# EAGLE board VGM-Panelized (EAGLE 7.7.0)
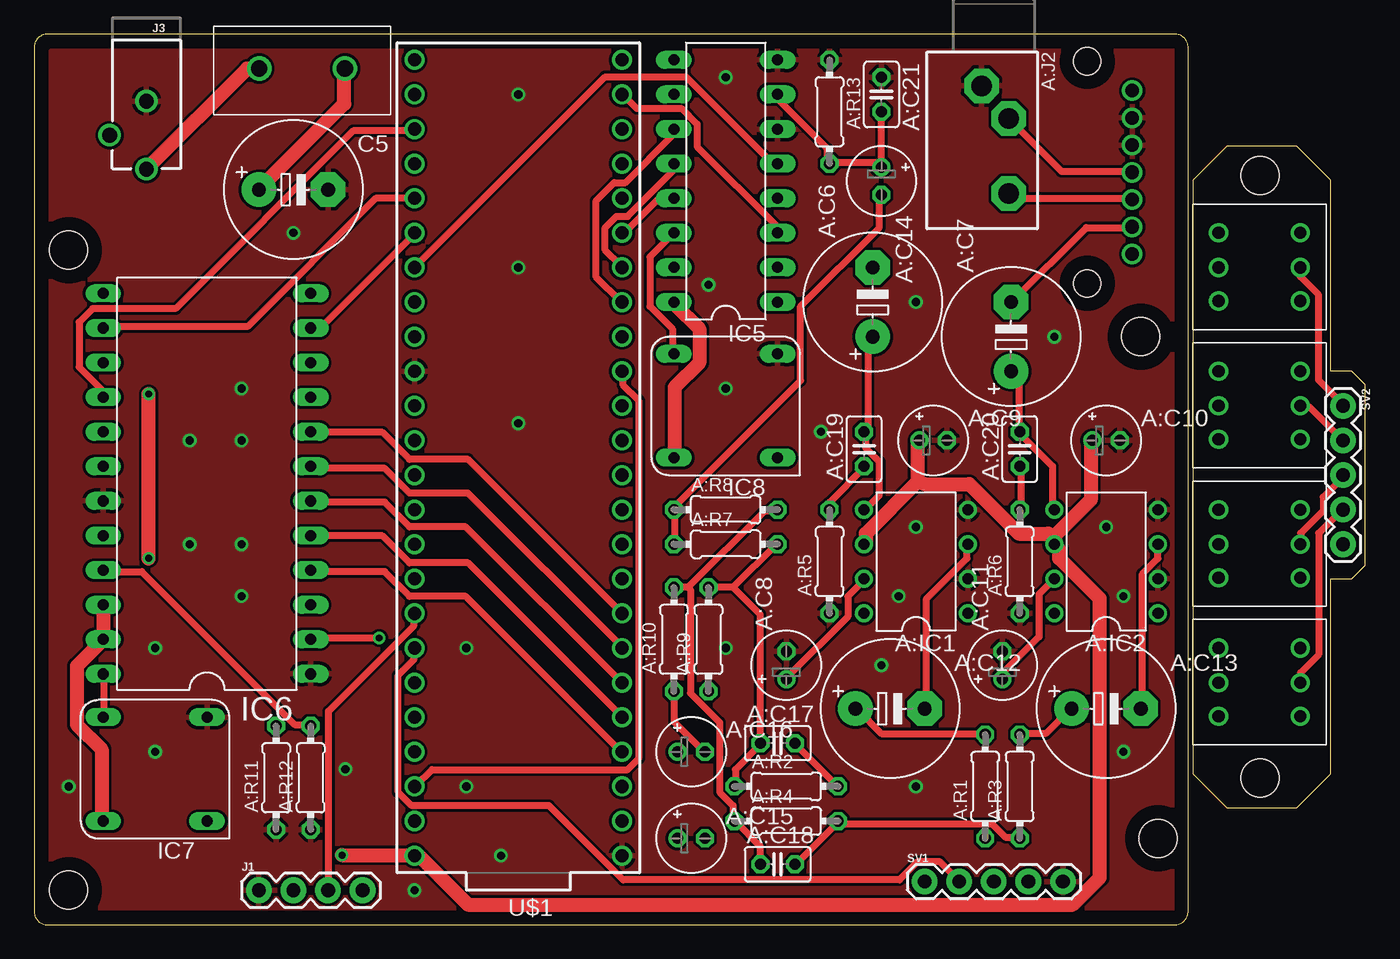
[diagram p0: board, top side]
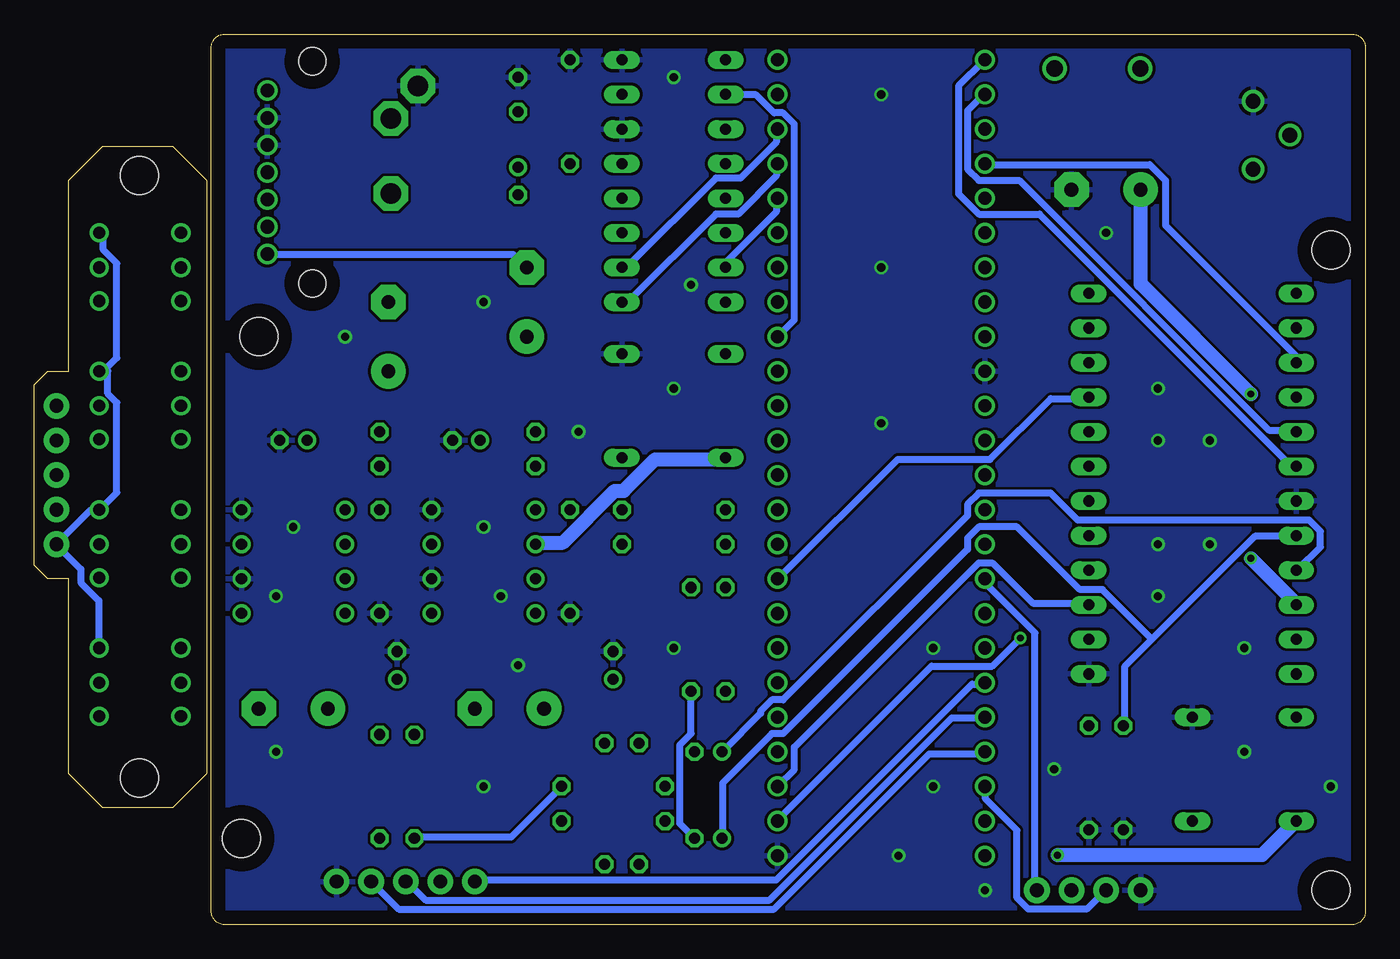
[diagram p1: board, bottom side, seen from below]

Size 97.78 x 65.39 mm. Coordinates in mm from the lower left corner, seen from the top.
Outline: 83.76,65.39 1,65.39 arc90 0,64.39 0,1 arc90 1,0 83.76,0 arc90 84.76,1 84.76,64.39 arc90 83.76,65.39
Outline: 95.25,40.64 95.25,54.65 92.75,57.15 87.59,57.15 85.09,54.65 85.09,11.09 87.59,8.59 92.74,8.59 95.24,11.08 95.25,25.4 96.78,25.4 97.78,26.4 97.78,39.64 96.78,40.64 95.25,40.64
Copper layers (1*16): Top 0.035mm / dielectric 1.5mm / Bottom 0.035mm
Design rules "default": minimum track width 10mil, minimum drill 24mil, track to track 8mil, track to pad 8mil, pad to pad 8mil, via to via 8mil, smd to smd 8mil, copper to edge 40mil, drill to drill 8mil, minimum pad ring 10mil, minimum via ring 8mil, stop-mask expansion 4mil, vias tented up to drill 0mil, thermal gap 10mil
Net classes: 0 default: width 0.508 mm; 1 power: width 1.016 mm
Holes 2.8 mm at 2.54,49.53 2.54,2.54 81.28,43.18 82.55,6.35 90.06,54.99 90.06,10.79

## Footprints (pad centres in the part's own frame; a part is rotated, then mirrored left to right if it is on the bottom)
E5-10,5 = drill 1.016 pad 2.54: + -2.54,0 | drill 1.016 pad 2.54 octagon: - 2.54,0
E2-5 = drill 0.813 pad 1.27: + -1.016,0 | drill 0.813 pad 1.27 octagon: - 1.016,0
C025-025X050 = drill 0.813 octagon: 1 -1.27,0; 2 1.27,0
DIL08 = drill 0.813 pad 1.27: 1 -3.81,-3.81; 2 -1.27,-3.81; 3 1.27,-3.81; 4 3.81,-3.81; 5 3.81,3.81; 6 1.27,3.81; 7 -1.27,3.81; 8 -3.81,3.81
SJ1-3533NG = drill 1.5 pad 2.54 octagon: 1 0,-0.9; 2 2.4,1.1; 3 7.9,1.1
0204/7 = drill 0.813 octagon: 1 -3.81,0; 2 3.81,0
P14O = drill 1: 1 -4,0; 1' -6,0; 2 -2,0; 2' 0,0; 3 2,0; 3' 4,0; NC 6,0 | hole 2: -8.15,3.3; 8.15,3.3
DIL16 = drill 0.813 long: 1 -8.89,-3.81; 2 -6.35,-3.81; 3 -3.81,-3.81; 4 -1.27,-3.81; 5 1.27,-3.81; 6 3.81,-3.81; 7 6.35,-3.81; 8 8.89,-3.81; 9 8.89,3.81; 10 6.35,3.81; 11 3.81,3.81; 12 1.27,3.81; 13 -1.27,3.81; 14 -3.81,3.81; 15 -6.35,3.81; 16 -8.89,3.81
DIL24-6 = drill 0.813 long: 1 -13.97,-7.62; 2 -11.43,-7.62; 3 -8.89,-7.62; 4 -6.35,-7.62; 5 -3.81,-7.62; 6 -1.27,-7.62; 7 1.27,-7.62; 8 3.81,-7.62; 9 6.35,-7.62; 10 8.89,-7.62; 11 11.43,-7.62; 12 13.97,-7.62; 13 13.97,7.62; 14 11.43,7.62; 15 8.89,7.62; 16 6.35,7.62; 17 3.81,7.62; 18 1.27,7.62; 19 -1.27,7.62; 20 -3.81,7.62; 21 -6.35,7.62; 22 -8.89,7.62; 23 -11.43,7.62; 24 -13.97,7.62
DIL08-CLK = drill 0.813 long: 5 3.81,3.81; 5V -3.81,3.81; GND 3.81,-3.81; NC -3.81,-3.81
1X04 = drill 1.016 pad 1.88: 1 0,0; 2 2.54,0; 3 5.08,0; 4 7.62,0
POWER_JACK_PTH = drill 1.1: GND 0,6.2; GNDBREAK 2.7,8.7; PWR 0,11.2
1X05 = drill 1.016 pad 1.88: 1 0,0; 2 2.54,0; 3 5.08,0; 4 7.62,0; 5 10.16,0
TEENSY_3.5_DIL = drill 0.965: 0 -7.62,26.67; 1 -7.62,24.13; 2 -7.62,21.59; 3 -7.62,19.05; 3.3V 7.62,24.13; 3.3V3 -7.62,-6.35; 4 -7.62,16.51; 5 -7.62,13.97; 6 -7.62,11.43; 7 -7.62,8.89; 8 -7.62,6.35; 9 -7.62,3.81; 10 -7.62,1.27; 11 -7.62,-1.27; 12 -7.62,-3.81; 13 7.62,-3.81; 14/A0 7.62,-1.27; 15/A1 7.62,1.27; 16/A2 7.62,3.81; 17/A3 7.62,6.35; 18/A4 7.62,8.89; 19/A5 7.62,11.43; 20/A6 7.62,13.97; 21/A7 7.62,16.51; 22/A8 7.62,19.05; 23/A9 7.62,21.59; 24 -7.62,-8.89; 25 -7.62,-11.43; 26 -7.62,-13.97; 27 -7.62,-16.51; 28 -7.62,-19.05; 29 -7.62,-21.59; 30 -7.62,-24.13; 31/A12 -7.62,-26.67; 32/A13 -7.62,-29.21; 33/A14 7.62,-29.21; 34/A15 7.62,-26.67; 35/A16 7.62,-24.13; 36/A17 7.62,-21.59; 37/A18 7.62,-19.05; 38/A19 7.62,-16.51; 39/A20 7.62,-13.97; A21 7.62,-11.43; A22 7.62,-8.89; AGND 7.62,26.67; GND -7.62,29.21; GND1 7.62,-6.35; VIN 7.62,29.21
PVA = drill 0.9: 0 2.54,6; 0' 2.54,0; 1 5,6; 1' 5,0; 2 0,6; 2' 0,0
GPTS = drill 1.2: P$1 -3.15,0; P$2 3.15,0

## Placement (x,y rotation side)
A:C6  1000uF  [E5-10,5]  61.59,45.72 90 top
A:C7  1000uF  [E5-10,5]  71.75,43.18 90 top
A:C8  100uF  [E2-5]  55.24,19.05 90 top
A:C9  100uF  [E2-5]  66.04,35.56 0 top
A:C10  100uF  [E2-5]  78.74,35.56 0 top
A:C11  100uF  [E2-5]  71.12,19.05 90 top
A:C12  16uF  [E5-10,5]  62.87,15.88 0 top
A:C13  16uF  [E5-10,5]  78.74,15.88 0 top
A:C14  1uF  [E2-5]  62.23,54.61 270 top
A:C15  10uF  [E2-5]  48.26,6.35 0 top
A:C16  10uF  [E2-5]  48.26,12.7 0 top
A:C17  4.7nF  [C025-025X050]  54.61,13.34 0 top
A:C18  4.7nF  [C025-025X050]  54.61,4.45 0 top
A:C19  47nF  [C025-025X050]  60.96,34.92 90 top
A:C20  47nF  [C025-025X050]  72.39,34.92 90 top
A:C21  220pF  [C025-025X050]  62.23,60.96 270 top
A:IC1  LM386N-1  [DIL08]  64.77,26.67 90 top
A:IC2  LM386N-1  [DIL08]  78.74,26.67 90 top
A:J2  SJ1-3533NG  [SJ1-3533NG]  70.48,61.59 270 top
A:R1  11k  [0204/7]  69.85,10.16 90 top
A:R2  10k  [0204/7]  55.24,10.16 0 top
A:R3  11k  [0204/7]  72.39,10.16 90 top
A:R4  10k  [0204/7]  55.24,7.62 0 top
A:R5  10  [0204/7]  58.42,26.67 90 top
A:R6  10  [0204/7]  72.39,26.67 90 top
A:R7  51k  [0204/7]  50.8,27.94 0 top
A:R8  51k  [0204/7]  50.8,30.48 0 top
A:R9  2.2k  [0204/7]  49.53,20.95 90 top
A:R10  2.2k  [0204/7]  46.99,20.95 90 top
A:R11  2.2k  [0204/7]  17.78,10.79 90 top
A:R12  2.2k  [0204/7]  20.32,10.79 90 top
A:R13  2.2k  [0204/7]  58.42,59.69 270 top
A:U$1  P140KV1  [P14O]  80.64,55.24 90 top
C5  1000uF  [E5-10,5]  19.05,53.98 0 top
IC5  SN  [DIL16]  50.8,54.61 90 top
IC6  YM  [DIL24-6]  12.7,32.38 90 top
IC7  7.68MHz  [DIL08-CLK]  8.89,11.43 90 top
IC8  3.57MHz  [DIL08-CLK]  50.8,38.1 90 top
J1  OLED_128X64_I2C  [1X04]  16.51,2.54 0 top
J3  POWER_JACK  [POWER_JACK_PTH]  8.26,66.67 180 top
SV1  [1X05]  65.41,3.17 0 top
SV2  [1X05]  96.14,38.1 270 top
U$1  TEENSY_3.5_DIL  [TEENSY_3.5_DIL]  35.56,34.29 180 top
U$2  PVA2-OA  [PVA]  87,20.32 270 top
U$3  PVA2-OA  [PVA]  87,30.48 270 top
U$4  PVA2-OA  [PVA]  87,40.64 270 top
U$5  PVA2-OA  [PVA]  87,50.8 270 top
U$7  GPTS20  [GPTS]  19.68,62.87 0 top

## Library data of the parts
A:C6 A:C7 C5 = resistor; HEIGHT: 17.5
A:C8 A:C11 = resistor; HEIGHT: 12.5
A:C9 A:C10 A:C14 = resistor; HEIGHT: 12.7
A:C12 A:C13 = resistor; HEIGHT: 26.5
A:C15 A:C16 = resistor; HEIGHT: 6.5
A:C17-A:C21 = resistor; HEIGHT: 3
A:IC1 A:IC2 = linear; HEIGHT: 4.2
A:J2 = con-cuistack; HEIGHT: 12.3
A:R1-A:R13 = resistor; HEIGHT: 1.5
A:U$1 = Sega; HEIGHT: 16.7
IC5 IC6 = Sega; HEIGHT: 4.2
IC7 IC8 = Sega; HEIGHT: 5.4
J1 SV1 SV2 = SparkFun-Connectors
J3 = Sega; HEIGHT: 11; PROD_ID: CONN-08197
U$1 = Teensy_3_and_LC_Series_Boards_v1.4; HEIGHT: 4.2
U$2-U$5 = Sega; HEIGHT: 17.54
U$7 = Sega; HEIGHT: 12

## Nets
3V3: J1.2 U$1.3.3V U$1.3.3V3
5V [power]: A:C9.+ A:C10.+ A:IC1.6 A:IC2.6 C5.+ IC5.16 IC6.22 IC6.23 IC7.5V IC8.5V U$1.VIN U$7.P$2
A:N$1: A:C7.- A:U$1.1
A:N$2: A:C6.- A:U$1.1'
A:N$3: A:C6.+ A:C19.2 A:IC1.5
A:N$4: A:C7.+ A:C20.2 A:IC2.5
A:N$5: A:C8.+ A:IC1.7
A:N$6: A:C11.+ A:IC2.7
A:N$7: A:C12.- A:IC1.3
A:N$8: A:C13.- A:IC2.3
A:N$9: A:C12.+ A:R1.2
A:N$10: A:C13.+ A:R3.2
A:N$11: A:C19.1 A:R5.2
A:N$12: A:C20.1 A:R6.2
A:N$13: A:C18.1 A:R4.1 A:R8.2 A:R10.2
A:N$14: A:C17.1 A:R2.1 A:R7.2 A:R9.2
A:N$15: A:C14.- A:R7.1 A:R8.1
A:N$16: A:C15.- A:R9.1
A:N$17: A:C16.- A:R10.1
A:N$18: A:C17.2 A:R1.1 A:R2.2
A:N$19: A:C18.2 A:R3.1 A:R4.2
A:N$20: A:J2.2 A:U$1.2'
A:N$21: A:J2.3 A:U$1.2
AGND: U$1.AGND
GND [power]: A:C8.- A:C9.- A:C10.- A:C11.- A:C21.1 A:IC1.2 A:IC1.4 A:IC2.2 A:IC2.4 A:J2.1 A:R5.1 A:R6.1 A:R11.1 A:R12.1 A:R13.1 A:U$1.3 A:U$1.3' C5.- IC5.6 IC5.8 IC6.1 IC6.19 IC7.GND IC8.GND J1.1 J3.GND SV1.5 U$1.GND U$1.GND1
I2C_SCL: J1.3 U$1.19/A5
I2C_SDA: J1.4 U$1.18/A4
N$1: IC6.24 IC7.5
N$2: SV2.4 U$2.0
N$3: SV2.3 U$3.0
N$4: SV2.2 U$4.0
N$5: SV2.1 U$5.0
N$6: SV2.5 U$2.2 U$3.2 U$4.2 U$5.2
N$7: J3.PWR U$7.P$1
N$11: IC5.14 IC8.5
NEXT_BUTTON: SV1.4 U$1.23/A9
PAUSE: SV1.2 U$1.20/A6
PREV_BUTTON: SV1.1 U$1.21/A7
RAND_BUTTON: SV1.3 U$1.22/A8
SN_D0: IC5.10 U$1.24
SN_D1: IC5.11 U$1.25
SN_D2: IC5.12 U$1.26
SN_D3: IC5.13 U$1.27
SN_D4: IC5.15 U$1.28
SN_D5: IC5.1 U$1.29
SN_D6: IC5.2 U$1.30
SN_D7: IC5.3 U$1.31/A12
SN_OUT: A:C14.+ A:C21.2 A:R13.2 IC5.7
SN_WE: IC5.5 U$1.39/A20
YM_A0: IC6.17 U$1.34/A15
YM_A1: IC6.18 U$1.33/A14
YM_CS: IC6.14 U$1.37/A18
YM_D0: IC6.2 U$1.0
YM_D1: IC6.3 U$1.1
YM_D2: IC6.4 U$1.2
YM_D3: IC6.5 U$1.3
YM_D4: IC6.6 U$1.4
YM_D5: IC6.7 U$1.5
YM_D6: IC6.8 U$1.6
YM_D7: IC6.9 U$1.7
YM_IC: IC6.11 U$1.38/A19
YM_MOL: A:C16.+ A:R12.2 IC6.21
YM_MOR: A:C15.+ A:R11.2 IC6.20
YM_RD: IC6.16 U$1.35/A16
YM_WR: IC6.15 U$1.36/A17

## Tracks (layer width: path | path; a pad name or v marks a point on that pad's centre or on a via)
3V3
  Top 0.508: U$1.3.3V3 43.26,40.62 43.26,39.62 44.41,38.47 44.41,12.22 43.59,11.39 29.22,11.39 28.07,10.24 U$1.3.3V
  Bottom 0.508: U$1.3.3V 27.9,10.07 27.9,9.25 25.59,6.93 25.59,1.98 24.77,1.16 20.47,1.16 19.15,2.48 J1.2
5V  (via drill 0.5)
  Top 1.016: IC8.5V 47.05,34.34 47.05,39.46 48.87,41.27 48.87,43.75 47.05,45.57 IC5.16 | 74.95,28.56 74.95,28.07 A:IC2.6 75.29,27.57 75.29,26.91 78.26,23.94 78.26,3.47 76.28,1.49 31.86,1.49 28.4,4.95 U$1.VIN 27.9,5.12 v22.62,5.12 | 74.95,28.56 77.6,31.2 77.6,35.5 A:C10.+ | 64.88,32.52 61.09,28.73 61.09,28.07 A:IC1.6 | 64.88,32.52 64.88,35.5 A:C9.+ | 74.95,28.56 74.46,28.73 72.31,28.73 68.68,32.36 65.38,32.36 64.88,32.52 | U$7.P$2 22.78,62.74 22.78,60.26 C5.+ | IC7.5V 4.95,7.76 4.95,12.88 3.14,14.69 3.14,18.99 4.95,20.8 IC6.23 5.12,21.46 5.12,23.44 IC6.22 | v8.42,26.91 v8.42,38.96
  Bottom 1.016: IC8.5V 47.05,34.18 52.17,34.18 54.48,31.86 55.14,31.86 58.94,28.07 60.92,28.07 A:IC1.6 | v22.62,5.12 7.59,5.12 5.12,7.59 IC7.5V | C5.+ 16.51,47.05 v8.42,38.96 | v8.42,26.91 5.12,23.61 IC6.22
A:N$1
  Top 0.508: A:U$1.1 80.57,51.18 77.27,51.18 71.82,45.73 A:C7.-
A:N$2
  Bottom 0.508: A:U$1.1' 80.57,49.2 62.57,49.2 61.75,48.37 A:C6.-
A:N$3
  Top 0.508: A:IC1.5 61.09,30.54 62.08,31.53 62.08,34.01 61.09,35 61.09,36.16 A:C19.2 61.25,36.32 61.25,42.76 61.58,43.09 A:C6.+
A:N$4
  Top 0.508: A:C7.+ 71.82,40.62 72.31,40.12 72.31,36.32 A:C20.2 72.48,35.99 74.79,33.68 74.79,30.54 A:IC2.5
A:N$5
  Top 0.508: A:C8.+ 55.31,18.16 59.77,22.62 59.77,24.11 60.92,25.26 A:IC1.7
A:N$6
  Top 0.508: A:IC2.7 73.8,24.27 73.8,21.13 71.16,18.49 71.16,18.16 A:C11.+
A:N$7
  Top 0.508: A:IC1.3 68.52,27.9 68.52,26.91 65.55,23.94 65.55,16.02 A:C12.-
A:N$8
  Top 0.508: A:IC2.3 82.55,26.91 81.39,25.76 81.39,16.02 A:C13.-
A:N$9
  Top 0.508: A:R1.2 69.84,14.03 62.24,14.03 60.43,15.85 A:C12.+
A:N$10
  Top 0.508: A:R3.2 72.48,14.03 74.3,14.03 76.11,15.85 A:C13.+
A:N$11
  Top 0.508: A:R5.2 58.45,30.54 58.45,31.04 60.92,33.52 A:C19.1
A:N$12
  Top 0.508: A:R6.2 72.48,30.54 72.48,33.52 A:C20.1
A:N$13
  Top 0.508: A:C18.1 53.33,4.46 53.33,5.78 51.51,7.59 A:R4.1 51.35,7.76 51.35,8.75 50.35,9.74 50.35,14.86 48.21,17 48.21,24.6 48.04,24.77 | 48.04,24.77 A:R10.2 | 48.04,24.77 53.66,30.38 54.48,30.38 A:R8.2
A:N$14
  Top 0.508: A:R2.1 51.51,10.24 51.51,11.39 53.33,13.21 A:C17.1 53.33,13.54 53.33,22.78 51.35,24.77 | 51.35,24.77 A:R9.2 | 51.35,24.77 54.48,27.9 A:R7.2
A:N$15
  Top 0.508: A:R7.1 47.05,28.07 47.05,30.38 A:R8.1 47.05,30.71 56.3,39.95 56.3,45.4 62.08,51.18 62.08,53.49 A:C14.-
A:N$16
  Bottom 0.508: A:R9.1 49.53,14.03 50.35,13.21 50.35,7.43 A:C15.-
A:N$17
  Top 0.508: A:R10.1 47.05,17 47.05,14.86 49.2,12.71 A:C16.-
A:N$18
  Top 0.508: A:R2.2 58.94,10.24 55.97,13.21 A:C17.2
  Bottom 0.508: A:R1.1 69.84,6.44 62.74,6.44 59.11,10.07 A:R2.2
A:N$19
  Top 0.508: A:C18.2 55.97,4.46 59.11,7.59 A:R4.2 59.27,7.43 70.33,7.43 71.32,6.44 72.31,6.44 A:R3.1
A:N$20
  Top 0.508: A:U$1.2' 80.57,55.31 75.45,55.31 71.65,59.11 A:J2.2
A:N$21
  Top 0.508: A:U$1.2 80.57,53.33 71.98,53.33 71.65,53.66 A:J2.3
GND  (via drill 0.6)
  other vias: 11.43,27.94 15.24,35.56 35.56,60.96 35.56,48.26 11.43,35.56 15.24,27.94 31.75,20.32 31.75,10.16 22.86,11.43 8.89,12.7 50.8,39.37 62.23,19.05 80.01,12.7 64.77,29.21 78.74,29.21 63.5,24.13 80.01,24.13 50.8,20.32 50.8,62.23 49.53,46.99 64.77,45.72 74.93,43.18 35.56,36.83 34.29,5.08 27.94,2.54 64.77,10.16 15.24,39.37 15.24,24.13 19.05,50.8 8.89,20.32 2.54,10.16 57.78,36.2
  pour Bottom: 1.27,64.14 83.82,64.14 83.82,1.27 1.27,1.27
  pour Top: 1.27,64.14 83.82,64.14 83.82,1.27 1.27,1.27
I2C_SCL
  Top 0.508: U$1.19/A5 27.9,22.78 27.9,21.96 21.63,15.68 21.63,2.64 J1.3
I2C_SDA
  Bottom 0.508: U$1.18/A4 27.9,25.26 27.9,25.07 24.27,21.44 24.27,2.64 J1.4
N$1
  Top 0.508: IC7.5 5.12,15.35 5.12,18.33 IC6.24
N$2
  Top 0.508: U$2.0 93.02,17.86 93.02,18.52 94.34,19.84 94.34,28.75 95.99,30.4 SV2.4
N$3
  Top 0.508: U$3.0 93.02,28.09 93.02,28.75 94.67,30.4 94.67,31.39 95.99,32.72 SV2.3
N$4
  Top 0.508: U$4.0 93.02,38 93.67,38 95.99,35.69 SV2.2
N$5
  Top 0.508: U$5.0 93.02,48.23 93.02,47.57 94.34,46.25 94.34,39.98 95.99,38.33 SV2.1
N$6
  Bottom 0.508: 92.69,40.64 91.69,41.63 91.69,48.56 92.69,49.55 92.69,50.55 U$5.2 | U$2.2 93.02,20.5 93.02,23.8 94.34,25.12 94.34,26.11 95.99,27.76 SV2.5 95.99,28.09 93.67,30.4 93.02,30.4 U$3.2 92.69,30.73 91.69,31.73 91.69,38.33 92.35,38.99 92.35,40.64 92.69,40.64 | 92.69,40.64 U$4.2
N$7
  Top 1.016: U$7.P$1 15.64,62.87 J3.PWR
N$11
  Top 0.508: IC8.5 46.89,41.94 46.89,43.75 45.24,45.4 45.24,49.03 46.89,50.69 IC5.14
NEXT_BUTTON
  Bottom 0.508: U$1.23/A9 28.07,12.55 32.03,12.55 43.42,1.16 70.99,1.16 72.97,3.14 SV1.4
PAUSE
  Top 0.508: U$1.20/A6 27.9,20.31 27.9,19.48 26.75,18.33 26.75,9.74 27.74,8.75 37.81,8.75 43.26,3.3 63.56,3.3 64.88,4.62 66.53,4.62 67.86,3.3 SV1.2
PREV_BUTTON
  Bottom 0.508: U$1.21/A7 28.07,17.67 28.89,17.67 43.26,3.3 65.38,3.3 SV1.1
RAND_BUTTON
  Bottom 0.508: U$1.22/A8 28.07,15.19 30.38,15.19 43.75,1.82 69.01,1.82 70.33,3.14 SV1.3
SN_D0
  Bottom 0.508: IC5.10 46.89,60.92 44.74,60.92 43.42,59.6 42.76,59.6 41.94,58.78 41.94,44.41 43.09,43.26 U$1.24
SN_D1
  Top 0.508: IC5.11 46.89,58.28 46.89,57.95 43.42,54.48 42.6,54.48 41.27,53.16 41.27,47.55 43.09,45.73 U$1.25
SN_D2
  Top 0.508: IC5.12 46.89,55.8 46.89,55.31 43.59,52.01 42.76,52.01 41.94,51.18 41.94,49.53 43.09,48.37 U$1.26
SN_D3
  Top 0.508: IC5.13 46.89,53.33 45.9,53.33 43.26,50.69 U$1.27
SN_D4
  Bottom 0.508: IC5.15 46.89,48.37 46.89,48.7 43.26,52.34 43.26,53.33 U$1.28
SN_D5
  Bottom 0.508: IC5.1 54.48,45.73 54.15,45.73 47.71,52.17 46.06,52.17 43.26,54.98 43.26,55.8 U$1.29
SN_D6
  Bottom 0.508: IC5.2 54.48,48.37 54.15,48.37 47.71,54.81 45.9,54.81 43.26,57.45 43.26,58.28 U$1.30
SN_D7
  Top 0.508: IC5.3 54.48,50.85 54.48,51.35 48.7,57.12 48.7,58.78 47.55,59.93 44.25,59.93 43.26,60.92 U$1.31/A12
SN_OUT
  Top 0.508: A:C21.2 62.24,59.6 62.24,55.64 A:C14.+ 62.08,55.97 58.61,55.97 A:R13.2 58.28,55.97 58.28,56.96 54.65,60.59 54.65,60.92 IC5.7
SN_WE
  Top 0.508: IC5.5 54.48,55.97 54.15,55.97 47.88,62.24 41.94,62.24 28.07,48.37 U$1.39/A20
YM_A0
  Bottom 0.508: IC6.17 5.12,36.32 7.1,36.32 25.43,54.65 28.4,54.65 29.22,55.47 29.22,59.77 28.07,60.92 U$1.34/A15
YM_A1
  Bottom 0.508: IC6.18 5.12,33.68 5.45,33.68 23.94,52.17 28.4,52.17 29.88,53.66 29.88,61.58 28.07,63.4 U$1.33/A14
YM_CS
  Top 0.508: IC6.14 5.12,43.92 15.68,43.92 25.09,53.33 27.9,53.33 U$1.37/A18
YM_D0  (via drill 0.5)
  Top 0.508: v25.34,21.05 20.22,21.05 IC6.2
  Bottom 0.508: v25.34,21.05 27.41,18.99 31.86,18.99 43.09,7.76 U$1.0
YM_D1
  Bottom 0.508: IC6.3 20.47,23.61 24.43,23.61 27.41,26.58 28.4,26.58 41.94,13.04 41.94,11.39 43.09,10.24 U$1.1
YM_D2
  Top 0.508: IC6.4 20.47,25.92 25.76,25.92 27.57,24.11 31.7,24.11 43.09,12.71 U$1.2
YM_D3
  Top 0.508: IC6.5 20.47,28.56 25.59,28.56 27.57,26.58 31.86,26.58 43.09,15.35 U$1.3
YM_D4
  Top 0.508: IC6.6 20.47,31.04 25.76,31.04 27.57,29.22 31.7,29.22 43.09,17.83 U$1.4
YM_D5
  Top 0.508: IC6.7 20.47,33.52 25.76,33.52 27.57,31.7 31.86,31.7 43.09,20.47 U$1.5
YM_D6
  Top 0.508: U$1.6 31.86,34.18 27.57,34.18 25.59,36.16 20.47,36.16 IC6.8
YM_D7
  Bottom 0.508: IC6.9 20.47,38.63 23.11,38.63 27.57,34.18 34.34,34.18 43.09,25.43 U$1.7
YM_IC
  Top 0.508: IC6.11 20.47,43.92 21.13,43.92 27.9,50.69 U$1.38/A19
YM_MOL
  Top 0.508: A:R12.2 20.31,14.69 19.15,14.69 7.92,25.92 5.12,25.92 IC6.21
  Bottom 0.508: A:C16.+ 47.22,12.71 44.41,15.52 44.41,15.68 43.59,16.51 42.76,16.51 29.22,30.05 29.22,30.87 28.4,31.7 23.11,31.7 21.13,29.72 4.13,29.72 3.3,28.89 3.3,27.74 4.95,26.09 IC6.21
YM_MOR
  Bottom 0.508: 15.68,20.97 17.67,18.99 17.67,14.69 A:R11.2 | 15.68,20.97 8.09,28.56 5.12,28.56 IC6.20 | 15.68,20.97 19.32,24.6 20.97,24.6 25.59,29.22 28.4,29.22 29.22,28.4 29.22,27.57 42.76,14.03 43.59,14.03 47.22,10.4 47.22,6.44 A:C15.+
YM_RD
  Top 0.508: IC6.16 4.95,38.8 4.95,39.29 3.3,40.95 3.3,44.25 4.29,45.24 10.4,45.24 23.44,58.28 27.9,58.28 U$1.35/A16
YM_WR
  Bottom 0.508: IC6.15 5.12,41.27 5.12,41.77 14.69,51.35 14.69,54.65 15.85,55.8 27.9,55.8 U$1.36/A17

## Text on the board
_tNames: J3 | A:J2 | A:C21 | A:R13 | C5 | A:C14 | A:C6 | A:C7 | IC5 | SV2 | A:C9 | A:C10 | IC8 | A:C19 | A:C20 | A:R8 | A:R7 | A:R5 | A:R6 | A:C8 | A:C11 | A:IC1 | A:IC2 | A:C12 | A:C13 | A:R10 | A:R9 | IC6 | A:C17 | A:C16 | A:R2 | A:R4 | A:R11 | A:R12 | A:R1 | A:R3 | A:C15 | IC7 | A:C18 | SV1 | J1 | U$1